# Altium PCB project.PcbDoc
Units mm, origin at the board's own origin, x right, y up, seen from the top; angles counter-clockwise.
Board outline 152.4 x 101.6 mm, 2 copper layers (Top Layer, Bottom Layer); 13 components, 13 nets, 64 pads, 0 vias.
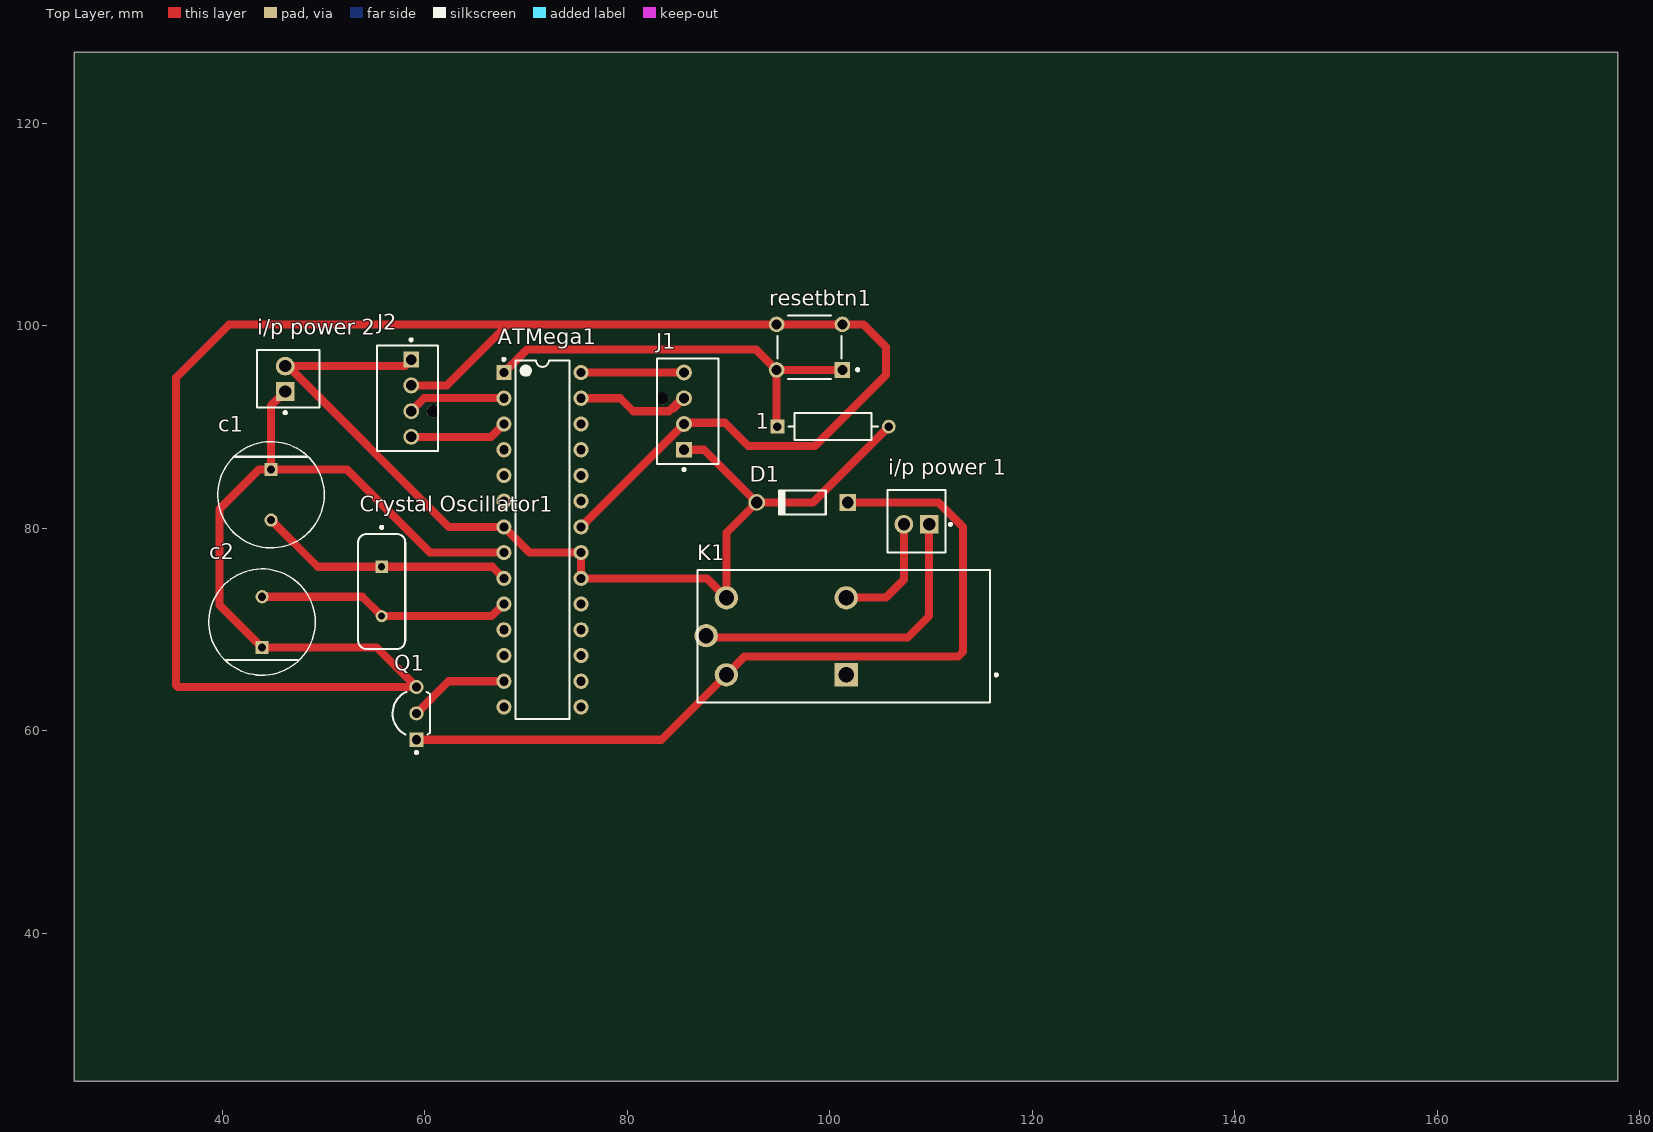
[diagram p0: Top Layer view]
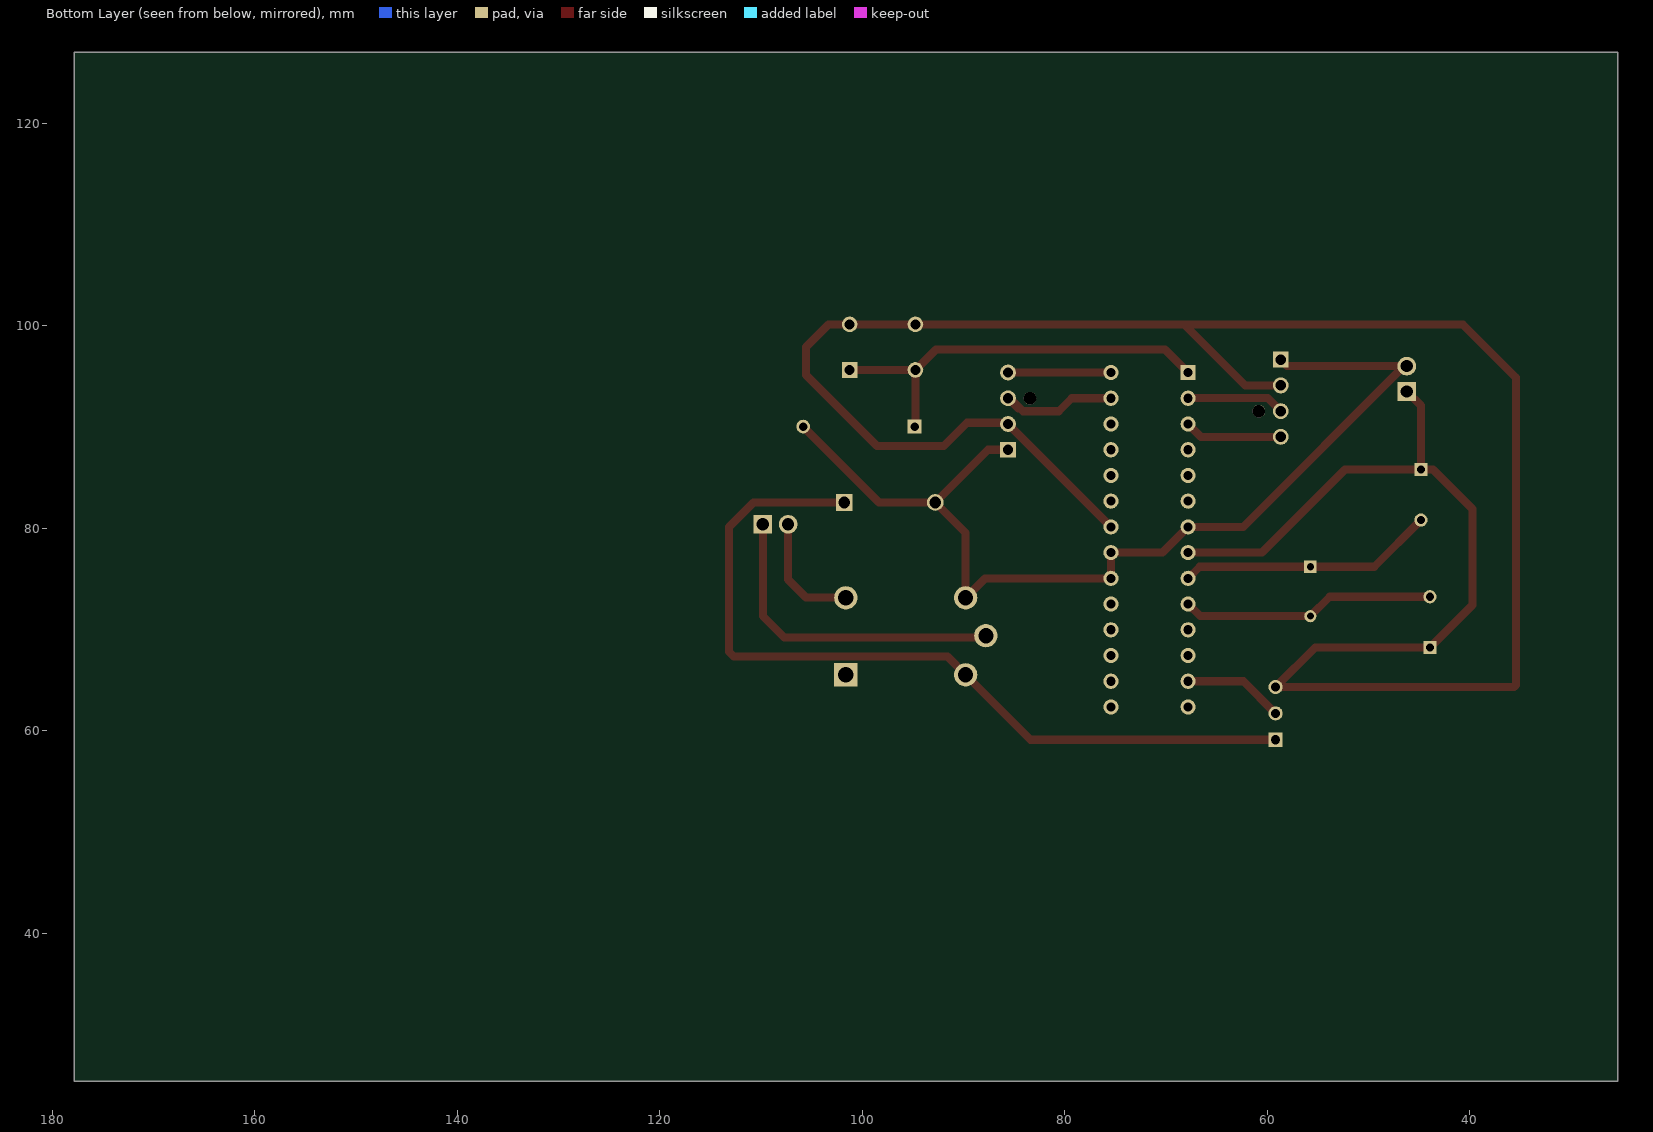
[diagram p1: Bottom Layer view, seen from below]
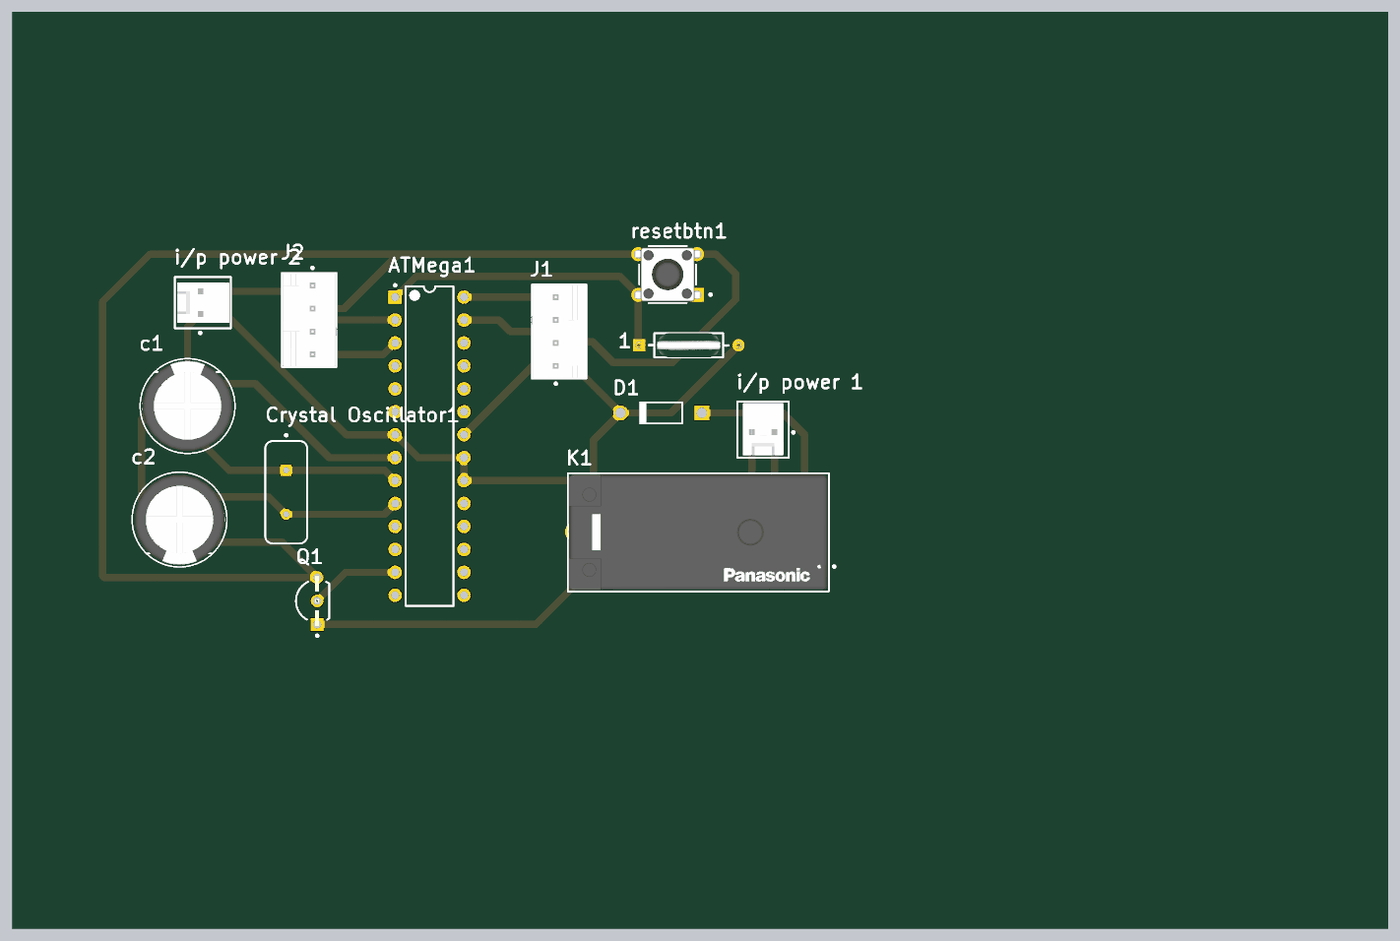
[diagram p2: 3D render of the assembled board from above, using the file's embedded part models]

## Layer stack, top to bottom
Top Solder: solder mask 0.0102, Solder Resist, Dk 3.5
Top Layer: signal copper 0.0356
Dielectric 1: dielectric 0.32, FR-4, Dk 4.8
Bottom Layer: signal copper 0.0356
Bottom Solder: solder mask 0.0102, Solder Resist, Dk 3.5

## Board outline
25.4,25.4 177.8,25.4 177.8,127 25.4,127

## Design rules (kind name [scope] priority, off if disabled: settings)
Clearance [All] p1: gap=0.254 ignorepadtopadclearanceinfootprint=FALSE except(0: Arc-Hole Track-Hole SMDPad-Hole THPad-Hole Via-Hole Fill-Hole Poly-Hole Region-Hole Text-Hole)
PolygonConnect [All] p1: connectstyle=Relief reliefconductorwidth=0.254 reliefentries=4 polygonreliefangle="90 Angle" airgapwidth=0.254
RoutingVias [All] p1: holewidth=0.711 width=1.27 viastyle="Through Hole" minholewidth=0.711 minwidth=1.27 maxholewidth=0.711 maxwidth=1.27
SolderMaskExpansion [All] p1: expansion=0.102 istentingtop=FALSE
Width [All] p1: maxlimit=0.8 minlimit=0.8 preferedwidth=0.8 minimp=50.000000 maximp=50.000000 favimp=50.000000
30 further rules are at their usual default settings.

## Classes and differential pairs
component class hexa: 1 ATMega1 c1 c2 "Crystal Oscillator1" D1 "i/p power 1" "i/p power 2" J1 J2 Q1 resetbtn1

## Components (designator, comment, footprint, x,y, rotation, side; value= is the part's Value field where it differs from the comment)
1 "RNC55H1002FSB14" FP-RNC55-MFG 100.33,90.043 r0 top value=10kΩ
ATMega1 "ATmega328-PU" 28P3 71.628,78.867 r0 top
c1 "22pf" FP-RAD-TH-D_10_0_5-L_20_2-MFG 44.831,83.312 r270 top
c2 "22pf" FP-RAD-TH-D_10_0_5-L_20_2-MFG 43.942,70.739 r90 top
"Crystal Oscillator1" "FOXSLF/160-20" FOX-FOXSLF160-20 55.753,73.76 r270 top
D1 "1N4001-T" DIOD-DO-41-P-2_V 97.282,82.55 r180 top
"i/p power 1" "j1" FP-22-04-1021-MFG 108.565,80.691 r180 top
"i/p power 2" "j1" FP-22-04-1021-MFG 46.528,94.762 r90 top
J1 "j2" FP-47053-3000-MFG 85.979,91.567 r270 top
J2 "j3" FP-47053-3000-MFG 58.293,92.837 r90 top
K1 "JW1FSN-B-DC24V" FP-JW1FSN-B-DC24V-MFG 101.389,69.332 r180 top
Q1 "BC547BRL1G" ONSC-TO-92-3-29-11_AM_BL 59.182,61.722 r90 top
resetbtn1 "3-1825910-1" FP-3-1825910-1-MFG 97.992,97.881 r180 top

## Footprints (in the part's own frame and the unit in brackets; to place one, negate y for a bottom-side part, rotate by r counter-clockwise, add the part's x,y. Pads: shape width x height; smd on the part's side, far side on the other; paste and mask are expansions set on the pad)
28P3 [mm] "28-Pin Plastic Dual In-Line Package (PDIP)"
  rect 1.5x1.5 hole 0.9: 1(-3.81,16.51)
  round 1.5 hole 0.9: 2(-3.81,13.97) 3(-3.81,11.43) 4(-3.81,8.89) 5(-3.81,6.35) 6(-3.81,3.81) 7(-3.81,1.27) 8(-3.81,-1.27) 9(-3.81,-3.81) 10(-3.81,-6.35) 11(-3.81,-8.89) 12(-3.81,-11.43) 13(-3.81,-13.97) 14(-3.81,-16.51) 15(3.81,-16.51) 16(3.81,-13.97) 17(3.81,-11.43) 18(3.81,-8.89) 19(3.81,-6.35) 20(3.81,-3.81) 21(3.81,-1.27) 22(3.81,1.27) 23(3.81,3.81) 24(3.81,6.35) 25(3.81,8.89) 26(3.81,11.43) 27(3.81,13.97) 28(3.81,16.51)
  silkscreen extent -3.93,-17.7 2.65,17.93, body extent -3.6,-17.65 3.6,17.65, height 4.58
DIOD-DO-41-P-2_V [mm] "2-Leads, Axial Lead, Body 4.635x2.36mm, Pin Spacing 9mm"
  rect 1.65x1.65 hole 1.15: 1(-4.5,0)
  round 1.65 hole 1.15: 2(4.5,0)
  silkscreen extent -2.32,-1.18 2.32,1.18, body extent -4.93,-1.18 4.93,1.18, height 2.35
FOX-FOXSLF160-20 [mm] "THD, 2-Leads, Body 11.35x4.65mm"
  rect 1.2x1.2 hole 0.7: 1(-2.44,0)
  round 1.2 hole 0.7: 2(2.44,0)
  silkscreen extent -6.45,-2.33 5.68,2.33, body extent -5.67,-2.32 5.68,2.33, height 3.6
FP-3-1825910-1-MFG [mm]
  rect 1.54x1.54 hole 0.99 paste-1000 mask+0: 1(-3.25,2.25)
  round 1.54 hole 0.99 paste-1000 mask+0: 2(3.25,2.25) 3(-3.25,-2.25) 4(3.25,-2.25)
  silkscreen extent -4.87,-3.14 3.14,3.14, body extent -4.12,-3.24 4.12,3.24, height 0.25
FP-22-04-1021-MFG [mm]
  rect 1.85x1.85 hole 1.2 paste-1000 mask+0: 1(-1.25,0.3)
  round 1.85 hole 1.2 paste-1000 mask+0: 2(1.25,0.3)
  silkscreen extent -3.48,-3.1 2.85,3.1, body extent -2.95,-3.2 2.95,3.2, height 0.25
FP-47053-3000-MFG [mm]
  rect 1.57x1.57 hole 1.02 paste-1000 mask+0: 1(3.81,-0.38)
  round 1.57 hole 1.02 paste-1000 mask+0: 2(1.27,-0.38) 3(-1.27,-0.38) 4(-3.81,-0.38)
  round 1.25 hole 1.25 unplated paste-1000 mask+0: ""(-1.27,-2.54)
  silkscreen extent -5.2,-3.02 5.9,3.02, body extent -5.3,-3.26 5.3,3.12, height 0.25
FP-JW1FSN-B-DC24V-MFG [mm]
  rect 2.3x2.3 hole 1.5 paste-1000 mask+0: 1(-0.23,3.8)
  round 2.3 hole 1.5 paste-1000 mask+0: 2(13.6,-0.065) 3(11.6,3.8) 4(-0.23,-3.8) 5(11.6,-3.8)
  silkscreen extent -15.18,-6.55 14.45,6.55, body extent -14.55,-6.65 14.55,6.65, height 0.25
FP-RAD-TH-D_10_0_5-L_20_2-MFG [mm]
  rect 1.3x1.3 hole 0.8 paste-1000 mask+0: 1(-2.5,0)
  round 1.3 hole 0.8 paste-1000 mask+0: 2(2.5,0)
  silkscreen extent -5.25,-5.25 5.25,5.25, body extent -5.35,-5.35 5.35,5.35, height 0.25
FP-RNC55-MFG [mm]
  rect 1.35x1.35 hole 0.85 paste-1000 mask+0: 1(-5.5,0)
  round 1.35 hole 0.85 paste-1000 mask+0: 2(5.5,0)
  silkscreen extent -4.42,-1.34 4.42,1.34, body extent -6.27,-1.45 6.27,1.45, height 0.25
ONSC-TO-92-3-29-11_AM_BL [mm] "TO, 3-Leads, Body Dia 4.7mm, Pitch 2.6mm"
  rect 1.4x1.4 hole 0.9: 1(-2.6,0)
  round 1.4 hole 0.9: 2(0,0) 3(2.6,0)
  silkscreen extent -3.97,-1.34 2.13,2.35, body extent -2.84,-1.34 2.84,2.35, height 5.33

## Part data
1: library part CMP-02408-000004-1, "RES 10K OHM 1/8W 1% AXIAL", Manufacturer=Vishay, Package=RNC55, Power Rating=0.125W, Resistance=10kΩ, Temperature="-65°C to +175°C", Temperature Coefficient=50ppm/°C, Temperature Range High=+175°C, Temperature Range Low=-65°C, Tolerance=1%, Voltage Rating=200V, Automotive=No, Category=Res, ComponentLink2Description=Datasheet, ComponentLink2URL=https://www.vishay.com/docs/31025/erc.pdf, Composition="Metal Film", Device Class L1="Passive Components", Device Class L2=Resistors, Device Class L3="Through-Hole Resistors", Digikey Description="RES 10K OHM 1/8W 1% AXIAL", Failure Rate=0.001%, Height=2.69mm, Ipc Land Pattern Name=RESAD1100W85L762D269, Lead Free=No, Manufacturer Part Number=RNC55H1002FSB14, Military Standard=true, Octopart=https://octopart.com/rnc55h1002fs-vishay-40848808, RoHS=FALSE, Series=RNC
ATMega1: library part CMP-0095-00015-2, "8-bit AVR Microcontroller, 32KB Flash, 1KB EEPROM, 2KB SRAM, 28-pin PDIP, Industrial Grade (-40°C to 85°C)", ComponentLink1Description="Manufacturer URL", ComponentLink1URL=http://www.atmel.com/, ComponentLink2Description="ATmega48A/48PA/88A/88PA/168A/168PA/328/328P Datasheet", ComponentLink2URL=http://www.atmel.com/dyn/resources/prod_documents/8271.pdf, ComponentLink3Description="ATmega48A/48PA/88A/88PA/168A/168PA/328/328P Summary", ComponentLink3URL=http://www.atmel.com/dyn/resources/prod_documents/8271S.pdf, DatasheetVersion="revD, May-2011", PackageDescription="28-lead (0.300\"/7.62mm Wide) Plastic Dual Inline Package (PDIP)", PackageReference=28P3, PackageVersion="revB, Sep-2001", RevisionNote="DatasheetVersion updated. URLs added."
c1 c2: library part CMP-05427-000214-1, "Aluminum Electrolytic Capacitors (Radial Lead Type) 10uF ±20% 400V", Capacitance=10uF, Case/Package=Radial, Dielectric Material=Aluminium, Max Operating Temperature=105°C, Min Operating Temperature=-25°C, Package Quantity=200, Ripple Current=80mA, Tolerance=20%, Voltage=400V, Construction=RADIAL, Contact Plating=Tin, Diameter=10mm, Dissipation Factor=0.24%, Height=20mm, Height - Seated (Max)=0.866inch, Lead Diameter=0.6mm, Lead Free="Lead Free", Lead Pitch=5mm, Lead/Base Style=Straight, Length=20mm, Life (Hours)=2000Hour, Mount="Through Hole", Number of Pins=2, Packaging=Bulk, Polarity=Polar, Radiation Hardening=No, REACH SVHC="No SVHC", Ripple Current (AC)=80mA, RoHS Compliant=Yes, Series=NHG, Termination=Radial, Voltage Rating=400V, Voltage Rating (DC)=400V
"Crystal Oscillator1": library part CMP-1749-00003-1, "Resistance Weld Thru-Hole Crystal, 16 MHz, -20 to 70 degC, 2-Pin THD, RoHS, Bulk", Case\Package=Axial, Max Operating Temperature="155 degC", Min Operating Temperature="-55 degC", Package Quantity=200, Power Rating="250 mW", Resistance="221 kohm", Tolerance=1%, Voltage Rating="250 V", ComponentLink1Description="Manufacturer URL", ComponentLink1URL=http://www.foxonline.com/, ComponentLink2Description=Datasheet, ComponentLink2URL=http://www.foxonline.com/pdfs/hc49slf.pdf, DatasheetVersion=Mar-15, Length="0.248 inch", Mount="Through Hole", PackageDescription="2-Pin Through Hole Device, Body 11.35 x 4.65 mm", PackageReference=FOXSLF160-20, Packaging=Bulk, RoHSCompliant=true
D1: library part CMP-0639-00006-2, "1.0 A Rectifier, 15 pF, 50 V, -65 to 150 degC, 2-Pin DO-41 Plastic, RoHS, Tape and Reel", Manufacturer="Diodes Inc", Max. Average Rectified Current IO (A)=1, Operating Temperature Range (degC)="-65 to 150", ComponentLink1Description="Manufacturer URL", ComponentLink1URL=http://diodes.com/, ComponentLink2Description=Datasheet, ComponentLink2URL=http://diodes.com/datasheets/ds28002.pdf, CT (pF)=15, DatasheetVersion="Rev. 8-2", Max. IFSM (A)=30, Max. IR (uA)=5, Mounting Technology="Through Hole", PackageDescription="2-Pin Axial Lead, Body 4.635 x 2.36 mm, Lead Spread 25.4 mm", PackageReference=DO-41-P-2, Packing="Tape and Reel", PartNumber=1N4001-T, RoHS=TRUE, VF (V)=1, VRRM (V)=50
"i/p power 1" "i/p power 2": library part CMP-04776-000257-1, "CONN HEADER VERT 2POS 2.5MM", Flammability Rating="UL94 V-0", Insulation Color=Natural, Insulation Resistance=1GR, Package Quantity=1000, Voltage Rating (DC)=250V, Connector Type=Header, Contact Material=Tin, Contact Mating Length=0.295inch, Contact Plating=Tin, Contact Post Length=0.134inch, Contact Shape=Square, Contact Type=-, Fastening Type=Friction, Gender=Male, Glow Wire Compliant=Non-compliant, Halogen Free="Low Halogen", Insulation Height=0.461inch, Insulation Material=Nylon, Lead Free="Lead Free", Mount="Through Hole", Number of Circuits=2, Number of Positions=2, Number of Rows=1, Packaging=Bulk, RoHS Compliant=Yes, Series=5045, Termination="Through Hole", Weight=0.007055oz
J1 J2: library part CMP-04776-000447-1, "CONN HEADER VERT 4POS 2.54MM", Current Rating=4A, Max Operating Temperature=75°C, Min Operating Temperature=0°C, Package Quantity=12000, Voltage Rating=250V, Contact Material="Copper Alloy", Contact Plating=Tin, Gender=Male, Glow Wire Compliant=Non-compliant, Halogen Free="Low Halogen", Mount="Through Hole", Number of Circuits=4, Number of Contacts=4, Number of Positions=4, Number of Rows=1, Orientation=Straight, Packaging=Bulk, Pitch=2.54mm, REACH SVHC="No SVHC", RoHS Compliant=Yes, Series=47053, Termination="Through Hole"
K1: library part CMP-05607-000133-1, "RELAY GEN PURPOSE SPDT 10A 24V", Coil Current=22mA, Coil Power=530mW, Coil Resistance=1.1kR, Coil Voltage (DC)=24V, Contact Current Rating=10A, Max Operating Temperature=85°C, Max Voltage Rating (AC)=250V, Max Voltage Rating (DC)=30V, Min Operating Temperature=-40°C, Package Quantity=100, Coil Type=Non-Latching, Contact Material=Silver, Contact Plating=Silver, Depth=12.8mm, Height=20mm, Lead Free="Lead Free", Length=28.6mm, Max Current Rating=10A, Mount="Through Hole", Number of Pins=5, Operate Time=15ms, Packaging=Bulk, Power Consumption=530mW, Power Rating=530mW, Radiation Hardening=No, Relay Function=SPDT, Relay Type="General Purpose", Release Time=5ms, RoHS Compliant=Yes, Series=JW, Termination="PC Pin", Throw Configuration=SPDT, Voltage Rating (AC)=250V, Voltage Rating (DC)=30V, Weight=13g, Width=12.8mm
Q1: library part CMP-1048-01605-1, "Amplifier Transistor, NPN Silicon, 3-Pin TO-92, Pb-Free, Tape and Reel", Manufacturer="On Semiconductor", ComponentLink1Description="Manufacturer URL", ComponentLink1URL=http://www.onsemi.com/, ComponentLink2Description=Datasheet, ComponentLink2URL=http://www.onsemi.com/pub_link/Collateral/BC546-D.PDF, ComponentLink3Description="Package Specification", ComponentLink3URL=http://www.onsemi.com/pub_link/Collateral/MAC97-D.PDF, DatasheetVersion="Rev. 7", fT Min (MHz)=150, IC Continuous (A)=0.1, Mounting Technology="Through Hole", PackageDescription="3-Pin Transistor Outline, Body 4.825 x 3.685 mm, Pitch 1.27 mm", PackageReference=TO-92-3-29-11_AM_BL, PackageVersion="Rev. AM", Packing="Tape and Reel", PartNumber=BC547BRL1G, Polarity=NPN, RoHS=TRUE
resetbtn1: library part CMP-03407-000001-1, "SWITCH TACTILE SPST-NO 0.05A 24V", Contact Current Rating=50mA, Contact Resistance=100mΩ, Manufacturer="TE Connectivity", Operating Force=160gf, Package=0, Temperature="-35°C to +85°C", Temperature Range High=+85°C, Temperature Range Low=-35°C, Automotive=No, Category=Switch, ComponentLink2Description=Datasheet, ComponentLink2URL=https://www.te.com/commerce/DocumentDelivery/DDEController?Action=srchrtrv&DocNm=1825910&DocType=Customer+Drawing&DocLang=English, Device Class L1=Electromechanical, Device Class L2=Switches, Device Class L3="Tactile Switches", Digikey Description="SWITCH TACTILE SPST-NO 0.05A 24V", Electromechanical Life=100000Cycles, Height=17.3mm, Lead Free=Yes, Manufacturer Part Number=3-1825910-1, Mount="Through Hole", Octopart=https://octopart.com/3-1825910-1-te+connectivity-46506874, RoHS=TRUE, Throw Configuration=SPST-NO

## Nets (pads, with @x,y where several pads share a name; then routed paths per layer and width w, separated by ;. In a path a pad name is that pad's centre, name@x,y a point inside that pad or via, vN(x,y) a via of type N, cw(c..) or ccw(c..) an arc to the next point about the centre after c; other vN are vias at no path point)
5v: 1.2 "i/p power 2.2" ATMega1.7 ATMega1.20 ATMega1.21 D1.2 J1.1 J2.1 K1.5 | length 103.1
  Top Layer w0.8: 46.228,96.012 46.503,96.012 ; J2.1 58.038,96.012 46.503,96.012 ; J1.1 87.575,87.757 D1.2 ; 1.2 98.337,82.55 D1.2 ; 46.503,96.012 62.378,80.137 ATMega1.7 70.358,77.597 ATMega1.21 ATMega1.20 87.864,75.057 K1.5 89.789,79.557 D1.2
GND: "i/p power 2.1" ATMega1.8 ATMega1.22 c1.1 c2.1 J1.2 J2.2 Q1.3 resetbtn1.3 resetbtn1.4 | length 254.6
  Top Layer w0.8: 46.395,93.345 46.228,93.512 44.831,92.115 c1.1 ; J2.2@58.317,94.107 J2.2 62.175,94.107 68.199,100.131 ; ATMega1.8 60.525,77.597 52.31,85.812 c1.1 ; ATMega1.22 J1.2 ; J1.2 85.726,90.424 89.662,90.424 91.948,88.138 98.552,88.138 105.537,95.123 105.537,97.917 103.323,100.131 resetbtn1.3 resetbtn1.4 68.199,100.131 ; c1.1 43.648,85.812 39.751,81.915 39.751,72.43 c2.1 55.265,68.239 Q1.3 35.649,64.322 35.433,64.538 35.433,94.869 40.695,100.131 68.199,100.131
Net1_1: 1.1 ATMega1.1 resetbtn1.1 resetbtn1.2 | length 40.8
  Top Layer w0.8: ATMega1.1 70.104,97.663 92.71,97.663 resetbtn1.2 ; 1.1 94.742,90.131 resetbtn1.2 ; resetbtn1.1 resetbtn1.2
NetATMega1_2: ATMega1.2 J2.3 | length 9.7
  Top Layer w0.8: J2.3 59.952,92.846 67.809,92.846 ATMega1.2
NetATMega1_3: ATMega1.3 J2.4 | length 9.7
  Top Layer w0.8: J2.4 66.548,89.027 ATMega1.3
NetATMega1_9: "Crystal Oscillator1.1" ATMega1.9 c1.2 | length 25.4
  Top Layer w0.8: c1.2 49.443,76.2 55.753,76.2 66.675,76.2 ATMega1.9
NetATMega1_10: "Crystal Oscillator1.2" ATMega1.10 c2.2 | length 25.2
  Top Layer w0.8: c2.2 53.834,73.239 55.753,71.32 66.621,71.32 ATMega1.10
NetATMega1_13: ATMega1.13 Q1.2 | length 10
  Top Layer w0.8: Q1.2 62.357,64.897 ATMega1.13
NetATMega1_27: ATMega1.27 J1.3 | length 12.6
  Top Layer w0.8: ATMega1.27 79.312,92.837 80.591,91.558 84.112,91.558 85.391,92.837 J1.3 84.593,91.831
NetATMega1_28: ATMega1.28 J1.4 | length 10.2
  Top Layer w0.8: ATMega1.28 J1.4
NetD1_1: D1.1 K1.3 Q1.1 | length 82.3
  Top Layer w0.8: Q1.1 83.379,59.122 K1.3 91.593,67.336 112.688,67.336 113.157,67.805 113.157,80.137 110.744,82.55 D1.1
"Neti/p power 1_1": "i/p power 1.1" K1.2 | length 32
  Top Layer w0.8: K1.2 87.971,69.215 107.696,69.215 109.815,71.334 109.815,80.391
"Neti/p power 1_2": "i/p power 1.2" K1.4 | length 11.9
  Top Layer w0.8: K1.4 101.639,73.152 105.537,73.152 107.315,74.93 107.315,80.391
pads on no net: ATMega1.4 ATMega1.5 ATMega1.6 ATMega1.11 ATMega1.12 ATMega1.14 ATMega1.15 ATMega1.16 ATMega1.17 ATMega1.18 ATMega1.19 ATMega1.23 ATMega1.24 ATMega1.25 ATMega1.26 J1. J2. K1.1